# Altium PCB Standalone Single-Width Base.PcbDoc
Units mm, origin at the board's own origin, x right, y up, seen from the top; angles counter-clockwise.
Board outline 26 x 63.65 mm, 4 copper layers (Top Layer, Layer 2, Layer 3, Bottom Layer), stack 0.583 mm thick; 11 components, 16 nets, 72 pads, 20 vias.
Unrouted connection lines stored in the file: 6.
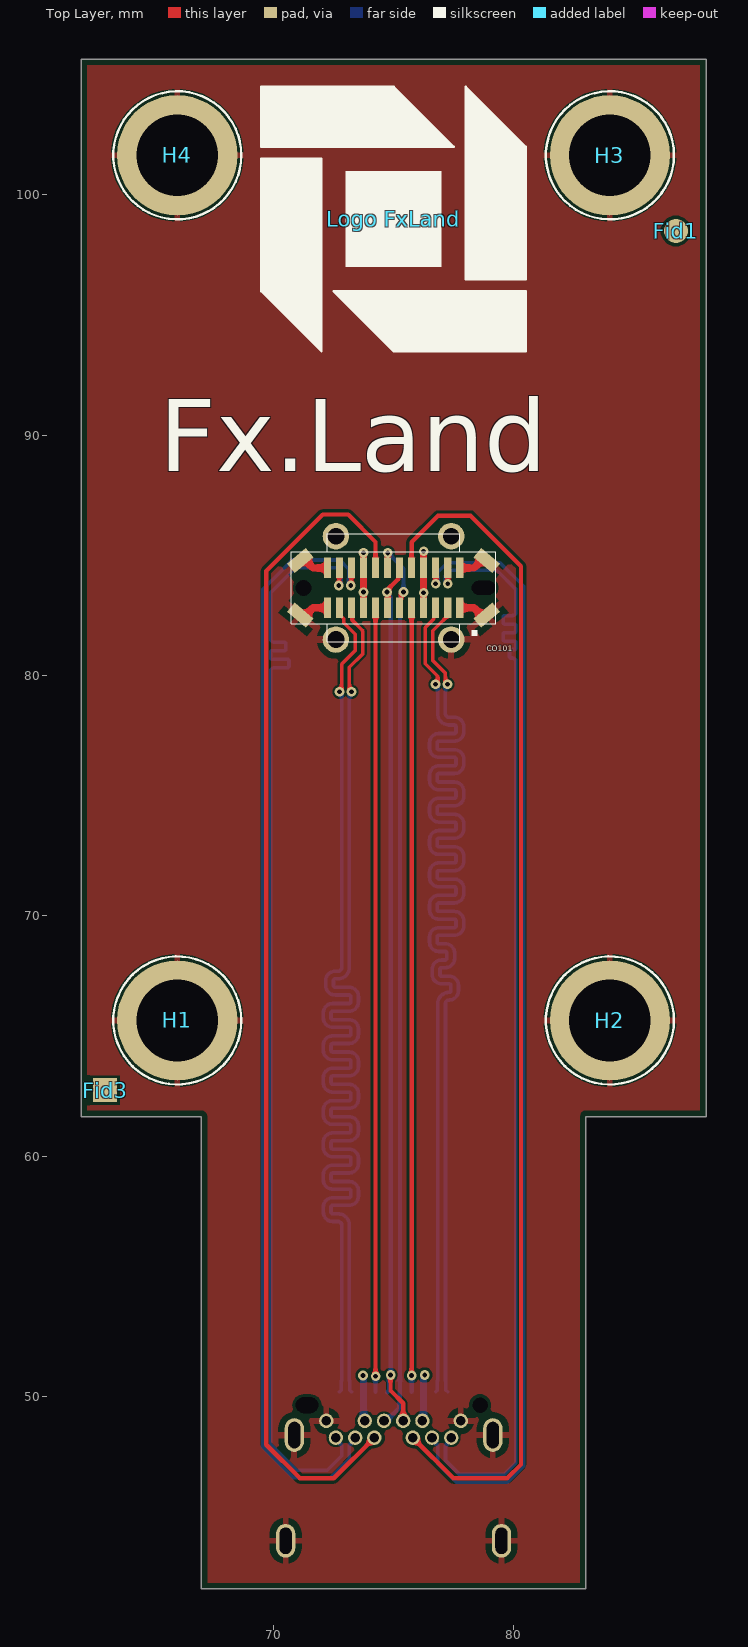
[diagram p0: Top Layer view]
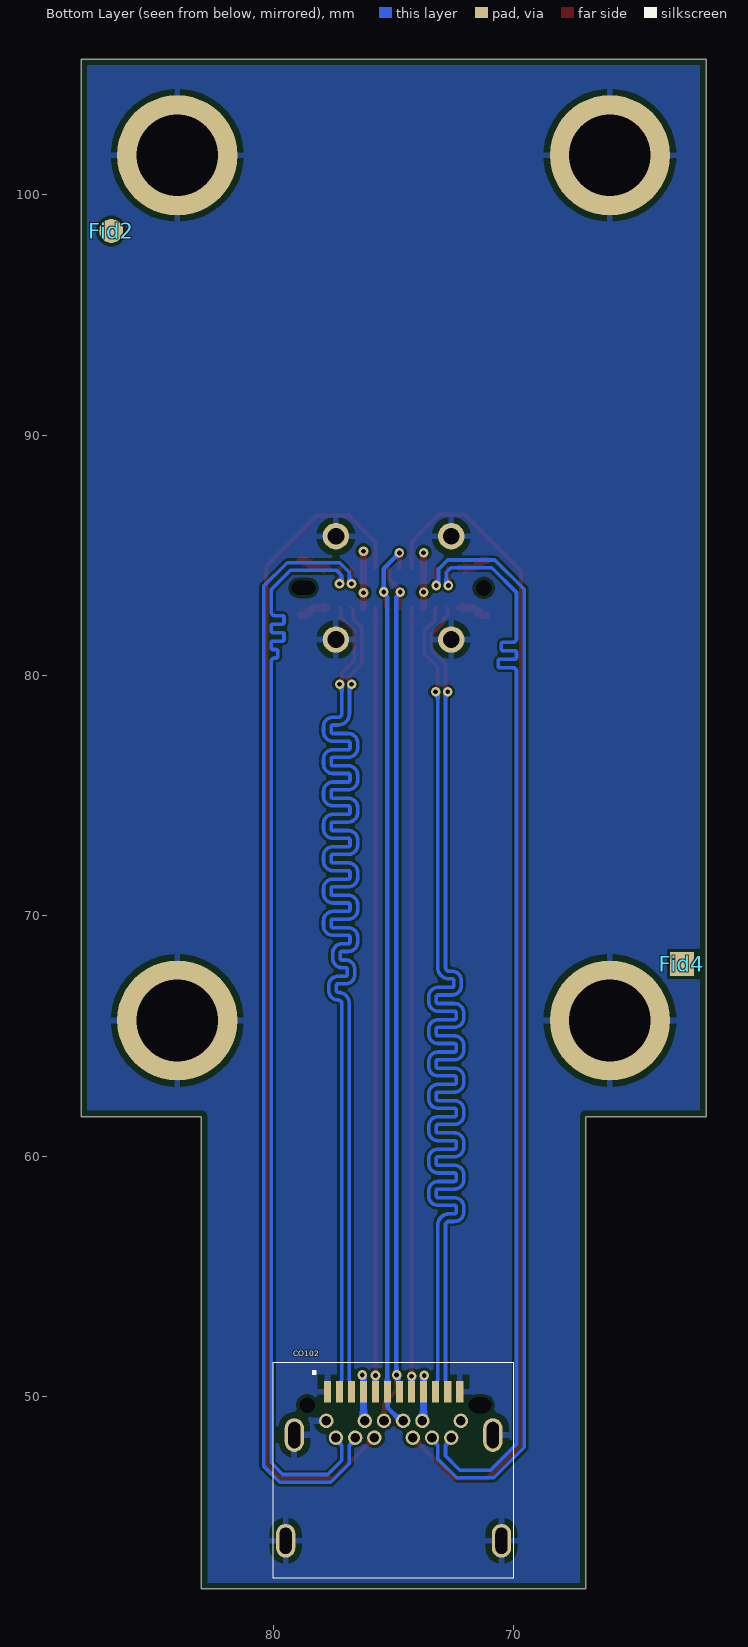
[diagram p1: Bottom Layer view, seen from below]
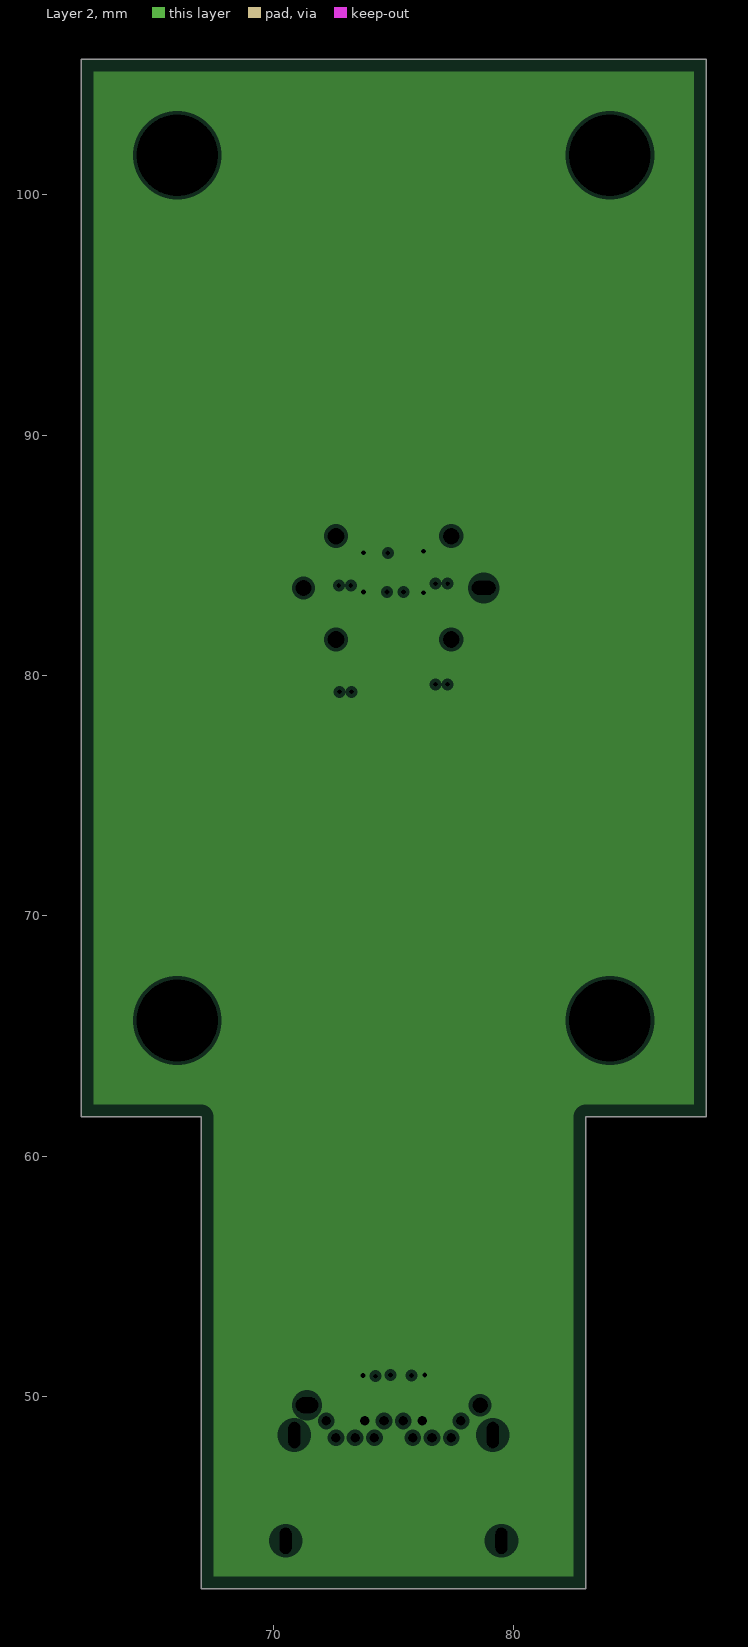
[diagram p2: Layer 2, clearances drawn from the general rule]
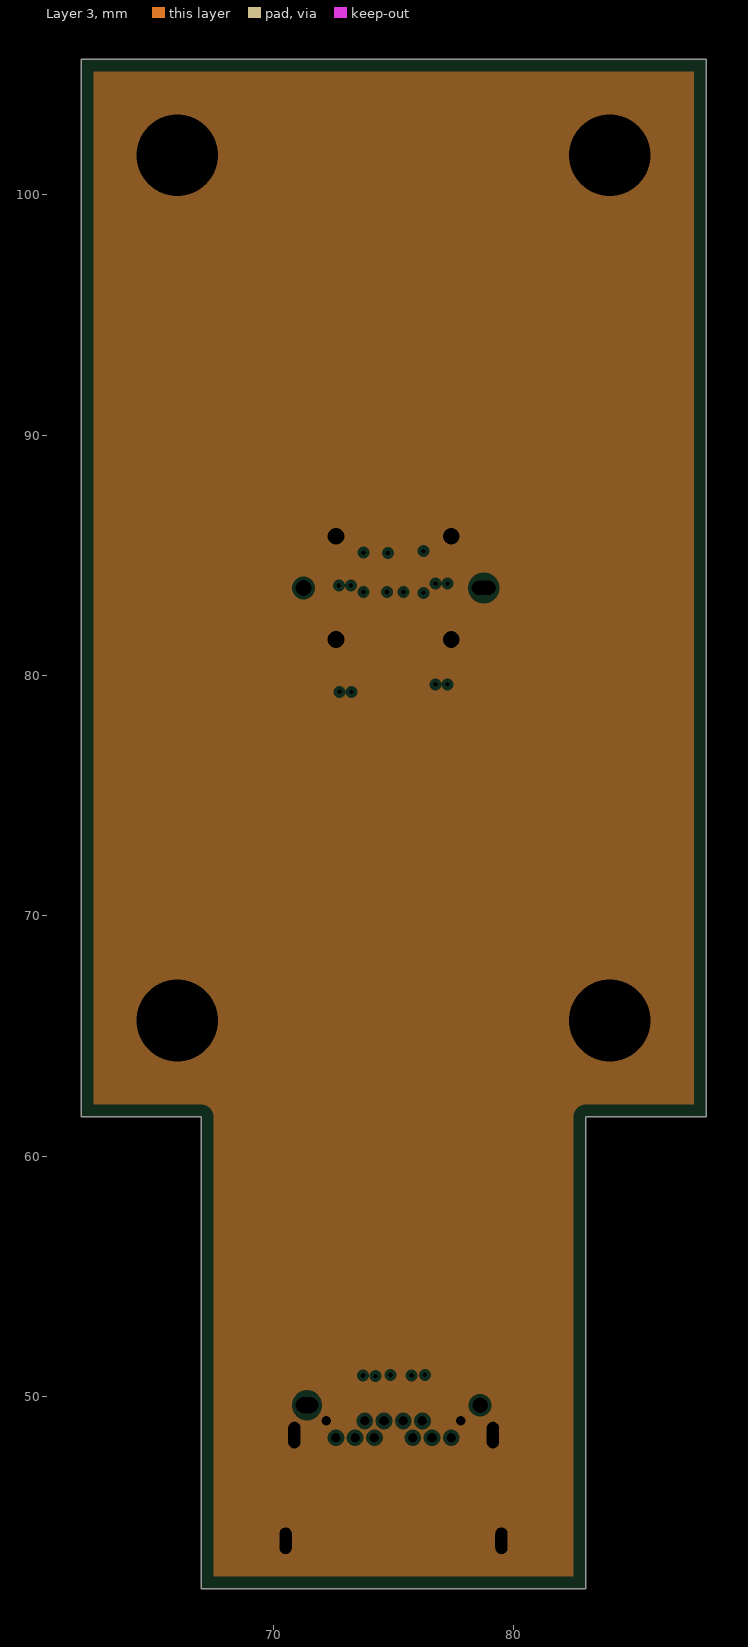
[diagram p3: Layer 3, clearances drawn from the general rule]

## Layer stack, top to bottom
Top Solder: solder mask 0.01, Solder Resist, Dk 3.5
Top Layer: signal copper 0.035
Dielectric 1: prepreg 0.107, PP-016, Dk 4.2
Layer 2: plane copper 0.035, net USB0_5V
Dielectric 2: core 0.229, Core-025, Dk 4.5
Layer 3: plane copper 0.035, net GND
Dielectric 3: prepreg 0.107, PP-016, Dk 4.2
Bottom Layer: signal copper 0.035
Board Layer Stack Bottom Solder: solder mask 0.01, Solder Resist, Dk 3.5

## Board outline
62,61.65 67,61.65 67,42 83,42 83,61.65 88,61.65 88,105.65 62,105.65

## Design rules (kind name [scope] priority, off if disabled: settings)
BoardOutlineClearance BoardOutlineClearanceText [OnLayer('Top Overlay')   or        OnLayer('Bottom Overlay')] p1: gap=0 ignorepadtopadclearanceinfootprint=FALSE
BoardOutlineClearance [All] p2: gap=0.254 ignorepadtopadclearanceinfootprint=FALSE except(0: Arc-SplitBarrior Arc-SplitContinuation Track-SplitBarrior Track-SplitContinuation SMDPad-SplitBarrior SMDPad-SplitContinuation THPad-SplitBarrior THPad-SplitContinuation Via-SplitBarrior Via-SplitContinuation Fill-SplitBarrior Fill-SplitContinuation Poly-SplitBarrior Poly-SplitContinuation Region-SplitBarrior Region-SplitContinuation Text-SplitBarrior Text-SplitContinuation)
Clearance Clearance_DiffPair [(InDifferentialPairClass('All Differential Pairs'))] p1: gap=0.1 ignorepadtopadclearanceinfootprint=TRUE except(0: Arc-Text Track-Text SMDPad-Text THPad-Text Via-Text Fill-Text Poly-Text Region-Text Text-Text Text-Hole)
Clearance Clearance_HighPWR [InNet('VPWR')  or   InNet('VIN') or InNet('PWR')] p2: gap=0.3 ignorepadtopadclearanceinfootprint=FALSE except(0: Arc-Text Track-Text SMDPad-Text THPad-Text Via-Text Fill-Text Poly-Text Region-Text Text-Text Text-Hole)
Clearance Clearance_MidPWR [InNet('+12V') or InNet('+5V')] p3: gap=0.2 ignorepadtopadclearanceinfootprint=TRUE except(0: Arc-Text Track-Text SMDPad-Text THPad-Text Via-Text Fill-Text Poly-Text Region-Text Text-Text Text-Hole)
Clearance Clearance_LowPWR [InNet('NetC104_1')] p4: gap=0.15 ignorepadtopadclearanceinfootprint=TRUE except(0: Arc-Text Track-Text SMDPad-Text THPad-Text Via-Text Fill-Text Poly-Text Region-Text Text-Text Text-Hole)
Clearance Clearance_DiffNets [All] p5: gap=0.125 ignorepadtopadclearanceinfootprint=TRUE except(0: Arc-Text Track-Text SMDPad-Text THPad-Text Via-Text Fill-Text Poly-Text Region-Text Text-Text Text-Hole)
Clearance Clearance_SameNets [All] p6: gap=0 ignorepadtopadclearanceinfootprint=FALSE
ComponentClearance [All] p1: gap=0 collisioncheckmode=3 verticalgap=0 showdistances=FALSE
DiffPairsRouting DiffPairsRouting_USB3 [InDifferentialPairClass('USB3')] p1: maxlimit=0.17 minlimit=0.17 mostfreqgap=0.17 toplayer_minwidth=0.15 toplayer_maxwidth=0.15 toplayer_prefwidth=0.15 bottomlayer_minwidth=0.15 bottomlayer_maxwidth=0.15 bottomlayer_prefwidth=0.15 impedanceprofiledriven=TRUE impedanceprofileid={4997A44F-92A9-41E2-A3C1-A9C6370F5069} impedanceprofilevalue=100.000000 filterlayerstackid={976BEA40-2DA4-42A2-9577-73BD5A797D81} maxuncoupledlength=12.7
DiffPairsRouting DiffPairsRouting_USB [InDifferentialPairClass('USB2')] p2: maxlimit=0.2 minlimit=0.2 mostfreqgap=0.2 toplayer_minwidth=0.18 toplayer_maxwidth=0.18 toplayer_prefwidth=0.18 bottomlayer_minwidth=0.18 bottomlayer_maxwidth=0.18 bottomlayer_prefwidth=0.18 impedanceprofiledriven=TRUE impedanceprofileid={3DF3AF70-7842-4A26-99BD-59D35006AED7} impedanceprofilevalue=90.000000 filterlayerstackid={976BEA40-2DA4-42A2-9577-73BD5A797D81} maxuncoupledlength=12.7
Height [All] p1: minheight=0 maxheight=100 prefheight=12.7
HoleSize [All] p1: absolutevalues=TRUE maxlimit=20 minlimit=0.2 maxpercent=80.000 minpercent=20.000
HoleToHoleClearance [All] p1: gap=0.125 allowstackedmicrovias=TRUE
MatchedLengths MatchLengths_xSignals_CO102_CO101 [InxSignalClass('xSignals_CO102_CO101_MatchLengthsClass')] p1: tolerance=0.1 checknetsindiffpair=FALSE checkdiffpairvsdiffpair=TRUE checkxsignals=TRUE checkothers=TRUE usedelayunits=TRUE delaytolerance=10.000000
MatchedLengths MatchedLengths_USB_DiffPairs [InDifferentialPair('No Differential Pair')] p2: tolerance=0.15 checknetsindiffpair=TRUE checkdiffpairvsdiffpair=FALSE checkxsignals=FALSE checkothers=FALSE usedelayunits=TRUE delaytolerance=10.000000
MinimumAnnularRing [All] p1: minimumring=0.1
MinimumSolderMaskSliver [All] p1: minsoldermaskwidth=0
PlaneClearance [All] p1: clearance=0.15
PlaneConnect [All] p1: planeconnectstyle=Direct reliefexpansion=0.508 reliefentries=4 reliefconductorwidth=0.254 reliefairgap=0.254
PolygonConnect PolygonConnect_HighPWR [InNet('VPWR')  or   InNet('VIN') or InNet('PWR')] p1: connectstyle=Relief reliefconductorwidth=1.25 reliefentries=4 polygonreliefangle="90 Angle" airgapwidth=0.254
PolygonConnect PolygonConnect_MidPWR [InNet('+12V') or InNet('+5V')] p2: connectstyle=Relief reliefconductorwidth=0.7 reliefentries=4 polygonreliefangle="90 Angle" airgapwidth=0.254
PolygonConnect PolygonConnect_LowPWR [InNet('NetC104_1')] p3: connectstyle=Relief reliefconductorwidth=0.5 reliefentries=4 polygonreliefangle="90 Angle" airgapwidth=0.254
PolygonConnect [All] p4: connectstyle=Relief reliefconductorwidth=0.254 reliefentries=4 polygonreliefangle="90 Angle" airgapwidth=0.254
RoutingVias [All] p1: holewidth=0.2 width=0.4 viastyle="Through Hole" minholewidth=0.2 minwidth=0.4 maxholewidth=0.2 maxwidth=0.4
SilkToSilkClearance [All] p1: silktosilkclearance=0
SilkToSolderMaskClearance [IsPad] p1: minsilkscreentomaskgap=0 clearancetoexposedcopper=TRUE
SolderMaskExpansion [All] p1: expansion=0.102 istentingtop=FALSE
UnRoutedNet [All] p1: checkbadconnections=TRUE
Width Width_power [InNet('USB0_5V')] p1: maxlimit=1 minlimit=0.254 preferedwidth=0.254 minimp=50.000000 maximp=50.000000 favimp=50.000000
Width Width_gnd [InNet('GND')] p2: maxlimit=1 minlimit=0.254 preferedwidth=0.254 minimp=50.000000 maximp=50.000000 favimp=50.000000
Width [All] p3: maxlimit=0.18 minlimit=0.18 preferedwidth=0.18 impedanceprofiledriven=TRUE impedanceprofileid={8F09A8EC-924F-4BEF-8019-70669F4D2E79} impedanceprofilevalue=50.000000 minimp=50.000000 maximp=50.000000 favimp=50.000000
19 further rules are at their usual default settings.

## Classes and differential pairs
differential pair class USB2: USB0
differential pair class USB3: USB0_RX1 USB0_RX2 USB0_TX1 USB0_TX2
differential pair USB0: +USB0_P -USB0_N
differential pair USB0_TX2: +USB0_TX2_P -USB0_TX2_N
differential pair USB0_TX1: +USB0_TX1_P -USB0_TX1_N
differential pair USB0_RX2: +USB0_RX2_P -USB0_RX2_N
differential pair USB0_RX1: +USB0_RX1_P -USB0_RX1_N

## Components (designator, comment, footprint, x,y, rotation, side; value= is the part's Value field where it differs from the comment)
CO101 "USB4070" USB4070-30-C 75,83.65 r180 top locked
CO102 "USB4056" USB4056-03-A 75,44 r180 bottom locked
Fid1 "Fiducial" FidR_1.0mm 86.75,98.5 r0 top
Fid2 "Fiducial" FidR_1.0mm 86.75,98.5 r180 bottom
Fid3 "Fiducial" FidS_1.0mm 63,62.75 r0 top
Fid4 "Fiducial" FidS_1.0mm 63,68 r180 bottom
H1 "Hole M3" HOLE_M3 66,65.65 r0 top locked
H2 "Hole M3" HOLE_M3 84,65.65 r0 top locked
H3 "Hole M3" HOLE_M3 84,101.65 r0 top locked
H4 "Hole M3" HOLE_M3 66,101.65 r0 top locked
"Logo FxLand" "FxLand" Logo_FxLand_3 75,99 r0 top

## Footprints (in the part's own frame and the unit in brackets; to place one, negate y for a bottom-side part, rotate by r counter-clockwise, add the part's x,y. Pads: shape width x height; smd on the part's side, far side on the other; paste and mask are expansions set on the pad)
FidR_1.0mm [mm]
  round 1 smd: 1(0,0)
FidS_1.0mm [mm]
  rect 1x1 smd: 1(0,0)
HOLE_M3 [mm]
  round 5 hole 3.4: 1(0,0)
  silkscreen extent -2.66,-2.66 2.67,2.66
Logo_FxLand_3 [mm]
  silkscreen extent -5.5,-5.5 5.5,5.5
USB4056-03-A [mm]
  round 0 hole 0.65 unplated: 0(-3.6,5.64)
  round 0 hole 0.65 slot 0.95 at 0 deg unplated: 0(3.6,5.64)
  rect 0.3x0.9 smd: 1(-2.75,6.2) 2(-2.25,6.2) 3(-1.75,6.2) 4(-1.25,6.2) 5(-0.75,6.2) 6(-0.25,6.2) 7(0.25,6.2) 8(0.75,6.2) 9(1.25,6.2) 10(1.75,6.2) 11(2.25,6.2) 12(2.75,6.2)
  round 0.6 hole 0.4: 21(2.8,4.99) 22(2.4,4.29) 23(1.6,4.29) 24(1.2,4.99) 25(0.8,4.29) 26(0.4,4.99) 27(-0.4,4.99) 28(-0.8,4.29) 29(-1.2,4.99) 30(-1.6,4.29) 31(-2.4,4.29) 32(-2.8,4.99)
  oval 0.8x1.4 hole 0.5 slot 1.1 at 90 deg: SH(-4.49,0) SH(-4.13,4.4) SH(4.13,4.4) SH(4.49,0)
  silkscreen extent -5,-1.55 5,7.4, body extent -4.91,-2.53 4.94,7.34, height 3.33
USB4070-30-C [mm]
  round 0 hole 0.58 slot 1 at 0 deg unplated mask+0: 0(-3.75,0)
  round 0 hole 0.66 unplated mask+0: 0(3.75,0)
  rect 0.3x0.85 smd: 1(-2.75,0.83) 2(-2.25,0.83) 3(-1.75,0.83) 4(-1.25,0.83) 5(-0.75,0.83) 6(-0.25,0.83) 7(0.25,0.83) 8(0.75,0.83) 9(1.25,0.83) 10(1.75,0.83) 11(2.25,0.83) 12(2.75,0.83) 21(2.75,-0.83) 22(2.25,-0.83) 23(1.75,-0.83) 24(1.25,-0.83) 25(0.75,-0.83) 26(0.25,-0.83) 27(-0.25,-0.83) 28(-0.75,-0.83) 29(-1.25,-0.83) 30(-1.75,-0.83) 31(-2.25,-0.83) 32(-2.75,-0.83)
  rect 0.5x1.03 smd rot 50: SH(-3.88,-1.135) SH(3.88,1.135)
  rect 0.5x1.03 smd rot 130: SH(-3.88,1.135) SH(3.88,-1.135)
  round 1.1 hole 0.7: SH(-2.4,2.15) SH(-2.4,-2.15) SH(2.4,2.15) SH(2.4,-2.15)
  silkscreen extent -4.25,-2.25 4.25,2.25, body extent -4.44,-2.27 4.43,2.28, height 10.54

## Part data
CO101: library part CO0021, "USB4070-30-C", ID=16, ManfactPart=USB4070-30-C, Part Number=CO0021, RefVal=USB4070
CO102: library part CO0030, "USB C connector Receptacle Horizontal", ID=29, ManfactPart=USB4056-03-A, Part Number=CO0030, RefVal=USB4056
Fid1 Fid2: library part ME0011, "Fiducial Round 1mm", ID=11, Part Number=ME0011, RefVal=Fiducial
Fid3 Fid4: library part ME0012, "Fiducial Sqaure 1mm", ID=12, Part Number=ME0012, RefVal=Fiducial
H1 H2 H3 H4: library part ME0001, "Mounting Hole M3", ID=1, Part Number=ME0001, RefVal="Hole M3"
"Logo FxLand": library part ME0008, "Logo FxLand 3", ID=8, Part Number=ME0008, RefVal=FxLand

## Via types
v1: diameter 0.4, hole 0.2, Top Layer to Bottom Layer, 20 vias

## Nets (pads, with @x,y where several pads share a name; then routed paths per layer and width w, separated by ;. In a path a pad name is that pad's centre, name@x,y a point inside that pad or via, vN(x,y) a via of type N, cw(c..) or ccw(c..) an arc to the next point about the centre after c; other vN are vias at no path point)
GND: CO101.1 CO101.12 CO101.21 CO101.32 CO101.SH CO102.1 CO102.12 CO102.21 CO102.32 CO102.SH H1.1 H2.1 H3.1 H4.1 | length 5.1
  Top Layer w0.3: CO101.SH@71.12,82.515 71.131,82.504 71.334,82.504 71.65,82.82 CO101.12 ; CO101.SH@71.12,84.785 71.131,84.796 71.334,84.796 71.65,84.48 CO101.21 ; CO101.1 78.35,82.82 78.666,82.504 78.869,82.504 CO101.SH@78.88,82.515 ; CO101.32 78.35,84.48 78.666,84.796 78.869,84.796 CO101.SH@78.88,84.785
USB0_5V: CO101.4 CO101.9 CO101.24 CO101.29 CO102.4 CO102.9 CO102.24 CO102.29 | length 8.5
  Top Layer w0.3: CO101.9 v1(73.75,83.475) CO101.24 v1(73.75,85.114) ; CO101.4 v1(76.25,83.445) CO101.29 v1(76.25,85.175)
  Bottom Layer w0.3: v1(73.726,50.878) 73.726,50.851 73.75,50.826 CO102.9 73.75,49.04 CO102.24 ; CO102.29 76.25,49.04 CO102.4 76.25,50.823 76.3,50.873 v1(76.3,50.9)
USB0_CC1: CO101.5 CO102.5 | length 32.6
  Top Layer w0.18: v1(75.75,50.875) CO101.5
  Bottom Layer w0.18: CO102.5 v1(75.75,50.875)
USB0_CC2: CO101.25 CO102.25 | length 49.2
  Top Layer w0.18: CO102.25 72.51,46.6 71.1,46.6 69.7,48 69.7,84.35 72.05,86.7 73.111,86.7 74.25,85.561 74.25,85.189 CO101.25
USB0_N: CO101.7 CO101.27 CO102.7 CO102.27 | length 37.2
  Top Layer w0.18: CO101.7 74.78,82.85 v1@74.78,83.415 ; v1@74.81,83.635 75.19,84.015 75.19,84.42 CO101.27 ; v1(74.874,50.9) 74.874,50.251 75.4,49.725 CO102.27
  Bottom Layer w0.18: v1(74.725,83.475) 74.725,83.419 74.884,83.26 v1@74.884,50.9 ; CO102.7@74.736,50.186 CO102.7 74.81,50.26 74.81,50.776 74.874,50.84 v1(74.874,50.9)
USB0_P: CO101.6 CO101.26 CO102.6 CO102.26 | length 38.2
  Top Layer w0.18: CO101.26 74.754,84.484 74.754,85.102 v1(74.758,85.106) ; CO101.6@75.223,82.793 CO101.6 75.31,82.88 75.31,83.317 75.411,83.419 v1(75.411,83.478)
  Bottom Layer w0.18: CO102.26 74.707,48.99 75.25,49.533 CO102.6 75.264,50.214 75.264,83.272 75.411,83.419 75.411,84.452 75.184,84.68 v1(74.758,85.106)
USB0_RX1_N: CO101.30 CO102.30 | length 47.3
  Top Layer w0.15: v1(76.75,83.825) CO101.30
  Bottom Layer w0.15: CO102.30 76.703,48.187 76.703,48.099 76.84,47.962 76.84,47.211 77.611,46.44 79.739,46.44 80.41,47.111 80.41,83.714 79.424,84.7 77.245,84.7 76.84,84.295 76.84,83.983 76.75,83.893 v1(76.75,83.825)
USB0_RX1_P: CO101.31 CO102.31 | length 47.4
  Top Layer w0.15: v1(77.25,83.825) CO101.31
  Bottom Layer w0.15: v1(77.25,83.825) 77.25,83.893 77.16,83.983 77.16,84.162 77.377,84.38 79.292,84.38 80.09,83.581 80.09,83.075 80.09,82.647 cw(c79.94,82.647) 79.94,82.497 79.629,82.497 ccw(c79.629,82.426) 79.558,82.426 79.558,82.214 ccw(c79.629,82.214) 79.629,82.144 80.019,82.144 cw(c80.019,82.073) 80.09,82.073 80.09,81.861 cw(c80.019,81.861) 80.019,81.79 79.629,81.79 ccw(c79.629,81.72) 79.558,81.72 79.558,81.508 ccw(c79.629,81.508) 79.629,81.437 80.019,81.437 cw(c80.019,81.367) 80.09,81.367 80.09,81.155 cw(c80.019,81.155) 80.019,81.084 79.893,81.084 ccw(c79.893,81.013) 79.822,81.013 79.822,80.801 ccw(c79.893,80.801) 79.893,80.731 79.94,80.731 cw(c79.94,80.581) 80.09,80.581 80.09,78.725 80.09,47.244 79.606,46.76 77.744,46.76 77.16,47.344 77.16,47.962 77.297,48.099 77.297,48.187 CO102.31
USB0_RX2_N: CO101.10 CO102.10 | length 47
  Top Layer w0.15: v1(73.25,79.325) 73.25,79.393 73.16,79.483 73.16,80.348 73.725,80.912 73.725,81.853 73.631,81.947 73.289,82.289 73.279,82.299 73.279,82.791 CO101.10
  Bottom Layer w0.15: v1@73.16,79.167 73.16,78.852 73.16,76.873 73.16,70.721 73.16,67.853 cw(c72.69,67.853) 72.69,67.383 72.57,67.383 ccw(c72.57,67.312) 72.499,67.312 72.499,67.1 ccw(c72.57,67.1) 72.57,67.03 73.15,67.03 cw(c73.15,66.639) 73.54,66.639 73.54,66.427 cw(c73.15,66.427) 73.15,66.037 72.469,66.037 ccw(c72.469,65.966) 72.398,65.966 72.398,65.754 ccw(c72.469,65.754) 72.469,65.683 73.15,65.683 cw(c73.15,65.293) 73.54,65.293 73.54,65.081 cw(c73.15,65.081) 73.15,64.69 72.469,64.69 ccw(c72.469,64.62) 72.398,64.62 72.398,64.408 ccw(c72.469,64.408) 72.469,64.337 73.15,64.337 cw(c73.15,63.946) 73.54,63.946 73.54,63.734 cw(c73.15,63.734) 73.15,63.344 72.469,63.344 ccw(c72.469,63.273) 72.398,63.273 72.398,63.061 ccw(c72.469,63.061) 72.469,62.991 73.15,62.991 cw(c73.15,62.6) 73.54,62.6 73.54,62.388 cw(c73.15,62.388) 73.15,61.997 72.469,61.997 ccw(c72.469,61.927) 72.398,61.927 72.398,61.715 ccw(c72.469,61.715) 72.469,61.644 73.15,61.644 cw(c73.15,61.254) 73.54,61.254 73.54,61.042 cw(c73.15,61.042) 73.15,60.651 72.469,60.651 ccw(c72.469,60.58) 72.398,60.58 72.398,60.368 ccw(c72.469,60.368) 72.469,60.298 73.15,60.298 cw(c73.15,59.907) 73.54,59.907 73.54,59.695 cw(c73.15,59.695) 73.15,59.305 72.469,59.305 ccw(c72.469,59.234) 72.398,59.234 72.398,59.022 ccw(c72.469,59.022) 72.469,58.951 73.15,58.951 cw(c73.15,58.561) 73.54,58.561 73.54,58.349 cw(c73.15,58.349) 73.15,57.958 72.469,57.958 ccw(c72.469,57.888) 72.398,57.888 72.398,57.676 ccw(c72.469,57.676) 72.469,57.605 72.69,57.605 cw(c72.69,57.135) 73.16,57.135 73.16,56.9 73.16,50.663 73.175,50.648 73.175,50.275 CO102.10
USB0_RX2_P: CO101.11 CO102.11 | length 47.1
  Top Layer w0.15: CO101.11 72.75,82.545 72.925,82.37 72.925,82.2 73.405,81.721 73.405,81.045 72.84,80.48 72.84,79.483 72.75,79.393 v1(72.75,79.325)
  Bottom Layer w0.15: CO102.11 72.825,50.275 72.825,50.648 72.84,50.663 72.84,56.9 72.84,57.135 ccw(c72.69,57.135) 72.69,57.285 72.469,57.285 cw(c72.469,57.676) 72.078,57.676 72.078,57.888 cw(c72.469,57.888) 72.469,58.278 73.15,58.278 ccw(c73.15,58.349) 73.22,58.349 73.22,58.561 ccw(c73.15,58.561) 73.15,58.631 72.469,58.631 cw(c72.469,59.022) 72.078,59.022 72.078,59.234 cw(c72.469,59.234) 72.469,59.625 73.15,59.625 ccw(c73.15,59.695) 73.22,59.695 73.22,59.907 ccw(c73.15,59.907) 73.15,59.978 72.469,59.978 cw(c72.469,60.368) 72.078,60.368 72.078,60.58 cw(c72.469,60.58) 72.469,60.971 73.15,60.971 ccw(c73.15,61.042) 73.22,61.042 73.22,61.254 ccw(c73.15,61.254) 73.15,61.324 72.469,61.324 cw(c72.469,61.715) 72.078,61.715 72.078,61.927 cw(c72.469,61.927) 72.469,62.317 73.15,62.317 ccw(c73.15,62.388) 73.22,62.388 73.22,62.6 ccw(c73.15,62.6) 73.15,62.671 72.469,62.671 cw(c72.469,63.061) 72.078,63.061 72.078,63.273 cw(c72.469,63.273) 72.469,63.664 73.15,63.664 ccw(c73.15,63.734) 73.22,63.734 73.22,63.946 ccw(c73.15,63.946) 73.15,64.017 72.469,64.017 cw(c72.469,64.408) 72.078,64.408 72.078,64.62 cw(c72.469,64.62) 72.469,65.01 73.15,65.01 ccw(c73.15,65.081) 73.22,65.081 73.22,65.293 ccw(c73.15,65.293) 73.15,65.363 72.469,65.363 cw(c72.469,65.754) 72.078,65.754 72.078,65.966 cw(c72.469,65.966) 72.469,66.357 73.15,66.357 ccw(c73.15,66.427) 73.22,66.427 73.22,66.639 ccw(c73.15,66.639) 73.15,66.71 72.57,66.71 cw(c72.57,67.1) 72.179,67.1 72.179,67.312 cw(c72.57,67.312) 72.57,67.703 72.69,67.703 ccw(c72.69,67.853) 72.84,67.853 72.84,70.721 v1@72.84,79.167
USB0_SBU1: CO101.8 CO102.8 | length 32.6
  Top Layer w0.18: v1(74.25,50.85) 74.25,52.05 CO101.8
  Bottom Layer w0.18: CO102.8 v1(74.25,50.85)
USB0_SBU2: CO101.28 CO102.28 | length 49.8
  Top Layer w0.18: CO101.28 75.75,85.55 76.85,86.65 78.2,86.65 80.3,84.55 80.3,47.175 79.725,46.6 77.49,46.6 CO102.28
USB0_TX1_N: CO101.3 CO102.3 | length 47.2
  Top Layer w0.15: v1(76.746,79.638) 76.746,79.705 76.836,79.795 76.836,79.975 76.316,80.495 76.316,81.999 76.675,82.358 76.675,82.745 CO101.3
  Bottom Layer w0.15: v1(76.746,79.638) 76.746,79.57 76.836,79.48 76.836,78.65 76.836,78.415 ccw(c77.306,78.415) 77.306,77.945 77.527,77.945 cw(c77.527,77.874) 77.598,77.874 77.598,77.662 cw(c77.527,77.662) 77.527,77.592 76.886,77.592 ccw(c76.886,77.201) 76.495,77.201 76.495,76.989 ccw(c76.886,76.989) 76.886,76.599 77.527,76.599 cw(c77.527,76.528) 77.598,76.528 77.598,76.316 cw(c77.527,76.316) 77.527,76.245 76.886,76.245 ccw(c76.886,75.855) 76.495,75.855 76.495,75.643 ccw(c76.886,75.643) 76.886,75.252 77.527,75.252 cw(c77.527,75.182) 77.598,75.182 77.598,74.97 cw(c77.527,74.97) 77.527,74.899 76.886,74.899 ccw(c76.886,74.508) 76.495,74.508 76.495,74.296 ccw(c76.886,74.296) 76.886,73.906 77.527,73.906 cw(c77.527,73.835) 77.598,73.835 77.598,73.623 cw(c77.527,73.623) 77.527,73.553 76.886,73.553 ccw(c76.886,73.162) 76.495,73.162 76.495,72.95 ccw(c76.886,72.95) 76.886,72.559 77.527,72.559 cw(c77.527,72.489) 77.598,72.489 77.598,72.277 cw(c77.527,72.277) 77.527,72.206 76.886,72.206 ccw(c76.886,71.816) 76.495,71.816 76.495,71.604 ccw(c76.886,71.604) 76.886,71.213 77.527,71.213 cw(c77.527,71.142) 77.598,71.142 77.598,70.93 cw(c77.527,70.93) 77.527,70.86 76.886,70.86 ccw(c76.886,70.469) 76.495,70.469 76.495,70.257 ccw(c76.886,70.257) 76.886,69.867 77.527,69.867 cw(c77.527,69.796) 77.598,69.796 77.598,69.584 cw(c77.527,69.584) 77.527,69.513 76.886,69.513 ccw(c76.886,69.123) 76.495,69.123 76.495,68.911 ccw(c76.886,68.911) 76.886,68.52 77.148,68.52 cw(c77.148,68.45) 77.219,68.45 77.219,68.238 cw(c77.148,68.238) 77.148,68.167 77,68.167 ccw(c77,67.776) 76.609,67.776 76.609,67.564 ccw(c77,67.564) 77,67.174 77.31,67.174 cw(c77.31,67.103) 77.381,67.103 77.381,66.891 cw(c77.31,66.891) 77.31,66.821 ccw(c77.31,66.351) 76.84,66.351 76.84,61.139 76.84,50.663 76.825,50.648 76.825,50.275 CO102.3
USB0_TX1_P: CO101.2 CO102.2 | length 47.3
  Top Layer w0.15: v1(77.246,79.638) 77.246,79.705 77.156,79.795 77.156,80.107 76.636,80.628 76.636,81.866 77.175,82.406 77.175,82.745 CO101.2
  Bottom Layer w0.15: v1(77.246,79.638) 77.246,79.57 77.156,79.48 77.156,78.65 77.156,78.415 ccw(c77.306,78.415) 77.306,78.265 77.527,78.265 cw(c77.527,77.874) 77.918,77.874 77.918,77.662 cw(c77.527,77.662) 77.527,77.272 76.886,77.272 ccw(c76.886,77.201) 76.815,77.201 76.815,76.989 ccw(c76.886,76.989) 76.886,76.919 77.527,76.919 cw(c77.527,76.528) 77.918,76.528 77.918,76.316 cw(c77.527,76.316) 77.527,75.925 76.886,75.925 ccw(c76.886,75.855) 76.815,75.855 76.815,75.643 ccw(c76.886,75.643) 76.886,75.572 77.527,75.572 cw(c77.527,75.182) 77.918,75.182 77.918,74.97 cw(c77.527,74.97) 77.527,74.579 76.886,74.579 ccw(c76.886,74.508) 76.815,74.508 76.815,74.296 ccw(c76.886,74.296) 76.886,74.226 77.527,74.226 cw(c77.527,73.835) 77.918,73.835 77.918,73.623 cw(c77.527,73.623) 77.527,73.233 76.886,73.233 ccw(c76.886,73.162) 76.815,73.162 76.815,72.95 ccw(c76.886,72.95) 76.886,72.879 77.527,72.879 cw(c77.527,72.489) 77.918,72.489 77.918,72.277 cw(c77.527,72.277) 77.527,71.886 76.886,71.886 ccw(c76.886,71.816) 76.815,71.816 76.815,71.604 ccw(c76.886,71.604) 76.886,71.533 77.527,71.533 cw(c77.527,71.142) 77.918,71.142 77.918,70.93 cw(c77.527,70.93) 77.527,70.54 76.886,70.54 ccw(c76.886,70.469) 76.815,70.469 76.815,70.257 ccw(c76.886,70.257) 76.886,70.187 77.527,70.187 cw(c77.527,69.796) 77.918,69.796 77.918,69.584 cw(c77.527,69.584) 77.527,69.193 76.886,69.193 ccw(c76.886,69.123) 76.815,69.123 76.815,68.911 ccw(c76.886,68.911) 76.886,68.84 77.148,68.84 cw(c77.148,68.45) 77.539,68.45 77.539,68.238 cw(c77.148,68.238) 77.148,67.847 77,67.847 ccw(c77,67.776) 76.929,67.776 76.929,67.564 ccw(c77,67.564) 77,67.494 77.31,67.494 cw(c77.31,67.103) 77.701,67.103 77.701,66.891 cw(c77.31,66.891) 77.31,66.501 ccw(c77.31,66.351) 77.16,66.351 77.16,61.139 77.16,50.663 77.175,50.648 77.175,50.275 CO102.2
USB0_TX2_N: CO101.23 CO102.23 | length 47.1
  Top Layer w0.15: v1(73.221,83.75) 73.235,83.765 73.235,84.465 CO101.23 CO101.23@73.25,84.205
  Bottom Layer w0.15: v1(73.221,83.75) 73.221,83.818 73.131,83.908 73.131,84.427 72.747,84.81 70.786,84.81 69.565,83.589 69.565,47.886 70.832,46.619 72.376,46.619 73.16,47.403 73.16,47.977 73.4,48.217 CO102.23
USB0_TX2_P: CO101.22 CO102.22 | length 47.2
  Top Layer w0.15: v1(72.721,83.75) 72.735,83.765 72.735,84.19 72.75,84.205 CO101.22
  Bottom Layer w0.15: CO102.22 72.6,48.217 72.84,47.977 72.84,47.536 72.244,46.939 70.964,46.939 69.885,48.019 69.885,79.75 69.885,80.178 cw(c70.035,80.178) 70.035,80.328 70.576,80.328 ccw(c70.576,80.399) 70.647,80.399 70.647,80.611 ccw(c70.576,80.611) 70.576,80.681 69.956,80.681 cw(c69.956,80.752) 69.885,80.752 69.885,80.964 cw(c69.956,80.964) 69.956,81.035 70.444,81.035 ccw(c70.444,81.105) 70.515,81.105 70.515,81.317 ccw(c70.444,81.317) 70.444,81.388 70.035,81.388 cw(c70.035,81.538) 69.885,81.538 69.885,82.8 69.885,83.456 70.919,84.49 72.615,84.49 72.811,84.294 72.811,83.908 72.721,83.818 v1(72.721,83.75)
pads on no net: CO101.0 CO102.0 Fid1.1 Fid2.1 Fid3.1 Fid4.1

## Polygon pours and split planes (outlines as drawn)
GND on Top Layer "GND_L01_P003" (solid, pour order 3): 62,106 88,106 88,42 62,42
GND on Bottom Layer "GND_L04_P000" (solid, pour order 0): 62,106 88,106 88,42 62,42
GND on Layer 3 (split plane): 87.49,62.16 83,62.16 82.9,62.151 82.805,62.122 82.716,62.074 82.639,62.011 82.576,61.934 82.528,61.845 82.499,61.75 82.49,61.65 82.49,42.51 67.51,42.51 67.51,61.65 67.501,61.75 67.472,61.845 67.424,61.934 67.361,62.011 67.284,62.074 67.195,62.122 67.1,62.151 67,62.16 62.51,62.16 62.51,105.14 87.49,105.14
USB0_5V on Layer 2 (split plane): 87.49,62.16 83,62.16 82.9,62.151 82.805,62.122 82.716,62.074 82.639,62.011 82.576,61.934 82.528,61.845 82.499,61.75 82.49,61.65 82.49,42.51 67.51,42.51 67.51,61.65 67.501,61.75 67.472,61.845 67.424,61.934 67.361,62.011 67.284,62.074 67.195,62.122 67.1,62.151 67,62.16 62.51,62.16 62.51,105.14 87.49,105.14

## Silkscreen, mask and mechanical layers (free items; w line width, h text height)
Board Shape:
  the board outline again, w0.025

## Text inside footprints (layer, text, board x,y; h text height)
"Logo FxLand": Top Overlay "Fx.Land" at 65.253,88.5 h3